# Altium PCB Exp 10_Rev-1.PcbDoc
Units mm, origin at the board's own origin, x right, y up, seen from the top; angles counter-clockwise.
Board outline 152.4 x 136.53 mm, 2 copper layers (Top Layer, Bottom Layer); 66 components, 92 nets, 217 pads, 0 vias.
Unrouted connection lines stored in the file: 7.
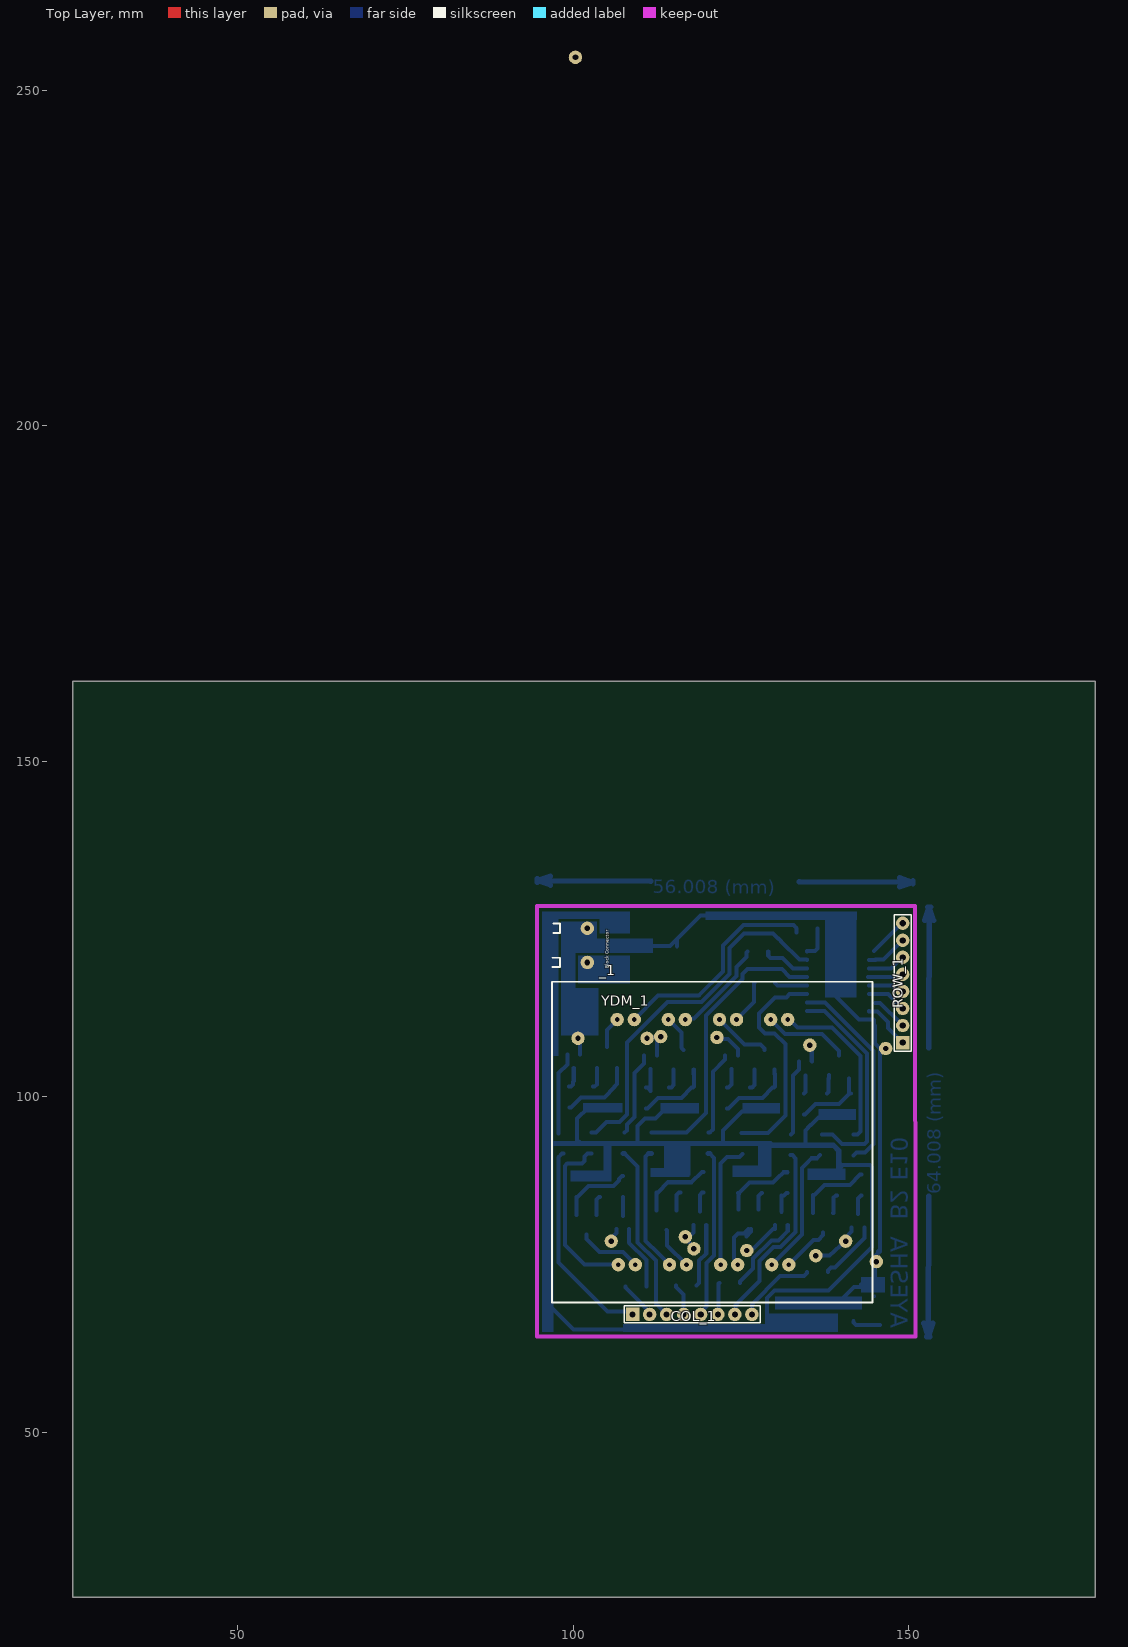
[diagram p0: Top Layer view]
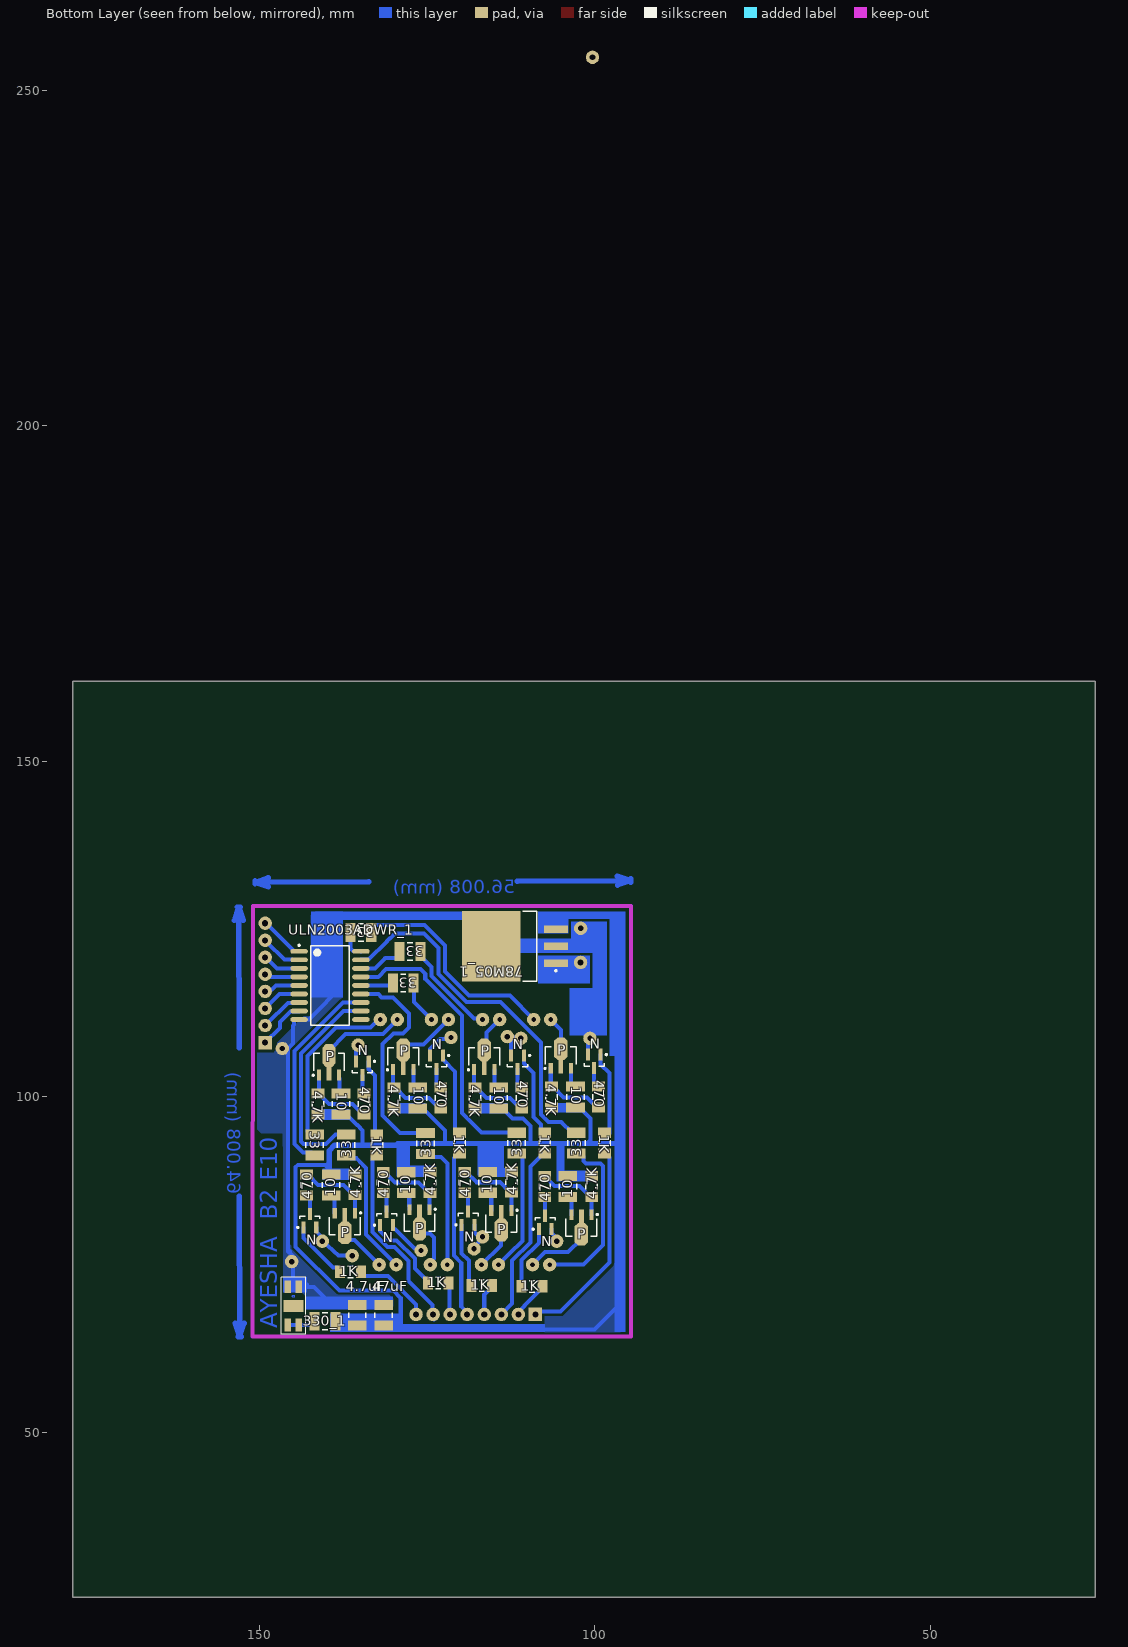
[diagram p1: Bottom Layer view, seen from below]

## Layer stack, top to bottom
Top Solder: solder mask 0.0102, Solder Resist, Dk 3.5
Top Layer: signal copper 0.0356
Dielectric 1: dielectric 0.32, FR-4, Dk 4.8
Bottom Layer: signal copper 0.0356
Bottom Solder: solder mask 0.0102, Solder Resist, Dk 3.5

## Board outline
25.4,25.4 177.8,25.4 177.8,161.925 25.4,161.925

## Design rules (kind name [scope] priority, off if disabled: settings)
Clearance [All] p1: gap=0.35 ignorepadtopadclearanceinfootprint=FALSE
PlaneClearance [All] p1: clearance=0.85
PolygonConnect [All] p1: connectstyle=Direct reliefconductorwidth=0.254 reliefentries=4 polygonreliefangle="90 Angle" airgapwidth=0.254
RoutingVias [All] p1: holewidth=0.711 width=1.27 viastyle="Through Hole" minholewidth=0.711 minwidth=1.27 maxholewidth=0.711 maxwidth=1.27
SolderMaskExpansion [All] p1: expansion=0.102 istentingtop=FALSE
Width [All] p1: maxlimit=1 minlimit=0.6 preferedwidth=0.6 minimp=50.000000 maximp=50.000000 favimp=50.000000
29 further rules are at their usual default settings.

## Components (designator, comment, footprint, x,y, rotation, side; value= is the part's Value field where it differs from the comment)
1K "Comment" RESC3216M 132.461,92.837 r270 bottom
1K "Comment" RESC3216M 98.552,93.091 r270 bottom
1K "Comment" RESC3216M 120.142,93.091 r270 bottom
1K "Comment" RESC3216M 107.442,93.091 r270 bottom
1K "Comment" RESC3216M 123.317,72.263 r180 bottom
1K "Comment" RESC3216M 116.84,71.882 r180 bottom
1K "Comment" RESC3216M 136.398,73.914 r180 bottom
1K "Comment" RESC3216M 109.347,71.755 r180 bottom
4.7K "Comment" RESC3216M 141.224,98.933 r270 bottom
4.7K "Comment" RESC3216M 106.426,99.949 r270 bottom
4.7K "Comment" RESC3216M 129.921,99.822 r270 bottom
4.7K "Comment" RESC3216M 117.856,99.822 r270 bottom
4.7K "Comment" RESC3216M 124.538,87.226 r90 bottom
4.7K "Comment" RESC3216M 112.395,87.275 r90 bottom
4.7K "Comment" RESC3216M 135.714,86.883 r90 bottom
4.7K "Comment" RESC3216M 100.457,86.64 r90 bottom
4.7uF "Comment" CAPC3225M 135.382,67.437 r90 bottom
10 "Comment" RESC3225M 137.795,98.933 r270 bottom
10 "Comment" RESC3225M 102.87,99.949 r270 bottom
10 "Comment" RESC3225M 126.365,99.822 r270 bottom
10 "Comment" RESC3225M 114.3,99.822 r270 bottom
10 "Comment" RESC3225M 128.094,87.2 r90 bottom
10 "Comment" RESC3225M 115.951,87.249 r90 bottom
10 "Comment" RESC3225M 139.27,86.857 r90 bottom
10 "Comment" RESC3225M 104.013,86.614 r90 bottom
33 "Comment" RESC3225M 134.848,124.46 r0 bottom
33 "Comment" RESC3225M 102.743,93.091 r90 bottom
33 "Comment" RESC3225M 111.633,93.091 r90 bottom
33 "Comment" RESC3225M 127.508,121.666 r0 bottom
33 "Comment" RESC3225M 125.217,93.041 r90 bottom
33 "Comment" RESC3225M 128.524,116.967 r0 bottom
33 "Comment" RESC3225M 137.033,92.837 r90 bottom
33 "Comment" RESC3225M 141.732,92.811 r270 bottom
47uF "Comment" CAPC3225M 131.445,67.437 r90 bottom
78M05_1 "Comment" TO254P1420-4M 111.891,122.428 r0 bottom
330_1 "Comment" RESC3225M 140.208,66.548 r180 bottom
470 "Comment" RESC3216M 134.366,98.933 r270 bottom
470 "Comment" RESC3216M 99.441,99.949 r270 bottom
470 "Comment" RESC3216M 122.936,99.822 r270 bottom
470 "Comment" RESC3216M 110.871,99.822 r270 bottom
470 "Comment" RESC3216M 131.523,87.2 r90 bottom
470 "Comment" RESC3216M 119.38,87.249 r90 bottom
470 "Comment" RESC3216M 142.953,86.857 r90 bottom
470 "Comment" RESC3216M 107.442,86.614 r90 bottom
_1 "Comment" "PCB Block Connector" 101.854,122.555 r90 top
COL_1 "Comment" HDR1X8 108.839,67.564 r0 top
N "Comment" SOT23-3M 134.62,104.267 r270 bottom
N "Comment" SOT23-3M 100.076,105.283 r270 bottom
N "Comment" SOT23-3M 123.571,105.156 r270 bottom
N "Comment" SOT23-3M 111.506,105.156 r270 bottom
N "Comment" SOT23-3M 131.015,81.866 r90 bottom
N "Comment" SOT23-3M 118.872,81.915 r90 bottom
N "Comment" SOT23-3M 142.445,81.523 r90 bottom
N "Comment" SOT23-3M 107.381,81.264 r90 bottom
P "Comment" SOT89M 139.597,105.151 r90 bottom
P "Comment" SOT89M 105.053,106.167 r90 bottom
P "Comment" SOT89M 128.524,105.967 r90 bottom
P "Comment" SOT89M 116.459,105.967 r90 bottom
P "Comment" SOT89M 126.111,81.28 r270 bottom
P "Comment" SOT89M 113.919,81.137 r270 bottom
P "Comment" SOT89M 137.238,80.745 r270 bottom
P "Comment" SOT89M 101.981,80.502 r270 bottom
ROW_1 "Comment" HDR1X8 149.098,108.077 r90 top
ULN2003ADWR_1 "Comment" SOIC127P1030-18M 139.446,116.586 r180 bottom
YDM_1 "Comment" "Yellow or Green Dot Matrix DIsplay" 120.607,93.244 r0 top locked net-tie
? "Comment" SMD-LED 144.907,68.834 r90 bottom

## Footprints (in the part's own frame and the unit in brackets; to place one, negate y for a bottom-side part, rotate by r counter-clockwise, add the part's x,y. Pads: shape width x height; smd on the part's side, far side on the other; paste and mask are expansions set on the pad)
CAPC3225M [mm] "Chip Capacitor, Body 3.2x2.5mm, IPC Low Density"
  rect 1.5x2.8 smd: 1(-1.55,0) 2(1.55,0)
  silkscreen extent -0.4,-1.3 0.4,1.3, body extent -1.7,-1.35 1.7,1.35, height 1.35
HDR1X8 [mm] "Connector; Header; 8 Position"
  rect 2x2 hole 0.9: 1(0,0)
  round 2 hole 0.9: 2(2.54,0) 3(5.08,0) 4(7.62,0) 5(10.16,0) 6(12.7,0) 7(15.24,0) 8(17.78,0)
  silkscreen extent -1.27,-1.27 19.05,1.27
"PCB Block Connector" [mm]
  round 2 hole 0.85: 1(-2.54,-0.254) 2(2.54,-0.24)
  silkscreen extent -3.22,3.82 3.25,4.96, body extent -5,-5.45 5.03,4.96, height 5.08
RESC3216M [mm] "Chip Resistor, Body 3.2x1.6mm, IPC Low Density"
  rect 1.5x1.9 smd: 1(-1.55,0) 2(1.55,0)
  silkscreen extent -0.4,-0.85 0.4,0.85, body extent -1.68,-0.87 1.68,0.87, height 0.71
RESC3225M [mm] "Chip Resistor, Body 3.2x2.5mm, IPC Low Density"
  rect 1.5x2.8 smd: 1(-1.55,0) 2(1.55,0)
  silkscreen extent -0.4,-1.3 0.4,1.3, body extent -1.68,-1.32 1.68,1.32, height 0.71
SMD-LED [mm] "SMD LED PCB"
  rect 1.9x1 smd: 1(-2.85,0.82) 2(-2.85,-0.82) 3(2.85,-0.82) 4(2.85,0.82)
  rect 1.8x3 smd: 5(0,0)
  Top Layer circle w0.154: c1.441,-0.01 r0.149
  silkscreen extent -4.25,-1.84 4.25,1.82
SOIC127P1030-18M [mm] "SOIC, 18-Leads, Body 11.6x7.5mm, Pitch 1.27mm, IPC Low Density"
  oval 2.6x0.7 smd: 1(-4.6,5.08) 2(-4.6,3.81) 3(-4.6,2.54) 4(-4.6,1.27) 5(-4.6,0) 6(-4.6,-1.27) 7(-4.6,-2.54) 8(-4.6,-3.81) 9(-4.6,-5.08) 10(4.6,-5.08) 11(4.6,-3.81) 12(4.6,-2.54) 13(4.6,-1.27) 14(4.6,0) 15(4.6,1.27) 16(4.6,2.54) 17(4.6,3.81) 18(4.6,5.08)
  silkscreen extent -4.72,-5.9 2.9,6.1, body extent -3.8,-5.95 3.8,5.95, height 2.65
SOT23-3M [mm] "SOT23, 3-Leads, Body 2.9x1.3mm, Pitch 0.95mm, Lead Span 2.5mm, IPC Low Density"
  rect 1.8x0.6 smd: b(-1,0.95) c(1,0) e(-1,-0.95)
  silkscreen extent -1.12,-1.5 0.7,1.92, body extent -0.7,-1.5 0.7,1.5, height 1.1
SOT89M [mm] "SOT89, 3-Leads, Body 4.5x2.4 mm, Pitch 1.5mm, Lead Span 4.1mm, IPC Low Density"
  rect 1.6x0.6 smd: b(-1.9,1.5) e(-1.9,-1.5)
  rect 2x0.7 smd: c(-1.7,0)
  oct 3.4x2 smd: c(1,0)
  silkscreen extent -2.07,-2.3 1.3,2.48, body extent -1.3,-2.3 1.3,2.3, height 1.6
TO254P1420-4M [mm] "D2-PAK, 4-Leads, Body 8.9x10.1mm, Pitch 2.54mm, Lead Span 14.2mm, IPC Low Density"
  rect 8.7x10.55 smd: C(3.55,0)
  rect 3.6x1.1 smd: GND(-6.1,0) input(-6.1,2.54) OUT(-6.1,-2.54)
  silkscreen extent -6.22,-5.2 -1.2,5.2, body extent -3.25,-5.2 6.15,5.2, height 4.65
"Yellow or Green Dot Matrix DIsplay" [mm] "Y or G Dot Matrix"
  round 2 hole 0.7: 3(-13.886,-18.262) 4(-11.346,-18.262) 6(-6.266,-18.262) 7(-3.726,-18.262) 9(1.354,-18.262) 10(3.894,-18.262) 12(8.974,-18.262) 13(11.514,-18.262) 20(11.346,18.262) 21(8.806,18.262) 23(3.726,18.262) 24(1.186,18.262) 26(-3.894,18.262) 27(-6.434,18.262) 29(-11.514,18.262) 30(-14.054,18.262)
  silkscreen extent -23.78,-23.9 23.99,23.89

## Free pads (board coordinates)
  round 2 hole 0.85: 2(100.33,254.889)
  round 2 hole 0.8: 3(136.144,76.327) 4(135.255,107.696) 5(121.412,108.839) 6(113.03,108.966) 7(100.711,108.712) 8(105.664,78.486) 9(116.713,79.121) 11(110.998,108.712) 12(146.558,107.188) 13(117.983,77.343) 15(145.161,75.438) 16(140.589,78.486)
  round 2 hole 0.762: 14(125.857,77.089)

## Nets (pads, with @x,y where several pads share a name; then routed paths per layer and width w, separated by ;. In a path a pad name is that pad's centre, name@x,y a point inside that pad or via, vN(x,y) a via of type N, cw(c..) or ccw(c..) an arc to the next point about the centre after c; other vN are vias at no path point)
1: 33.1@102.743,91.541 YDM_1.3 | length 26.1
  Bottom Layer w0.6: 33.1@102.743,91.541 102.093,91.541 101.643,91.091 101.643,90.394 101.292,90.043 99.106,90.043 98.755,89.692 98.755,77.902 101.675,74.982 YDM_1.3
2: P.c@101.981,79.502 P.c@101.981,82.202 YDM_1.4 | length 9.6
  Bottom Layer w0.6: P.c@101.981,79.502 101.981,78.802 103.947,76.836 107.406,76.836 YDM_1.4
3: 33.1@111.633,91.541 YDM_1.6 | length 18.6
  Bottom Layer w0.6: 33.1@111.237,91.541 110.795,91.099 110.795,78.527 112.71,76.612 YDM_1.6
  Bottom Layer w0.8: 33.1@111.237,91.541 33.1@111.633,91.541
4: P.c@113.919,80.137 P.c@113.919,82.837 YDM_1.7 | length 6.4
  Bottom Layer w0.6: P.c@113.919,80.137 113.98,80.076 113.98,77.87 116.868,74.982 YDM_1.7
5: 33.1@125.217,91.491 YDM_1.9 | length 18.7
  Bottom Layer w0.6: YDM_1.9@121.96,75.236 121.96,90.083 122.918,91.041 124.767,91.041 33.1@125.217,91.491
6: P.c@126.111,80.28 P.c@126.111,82.98 YDM_1.10 | length 8.3
  Bottom Layer w0.6: YDM_1.10 124.5,75.361 123.952,75.909 123.952,78.994 124.562,79.604 125.435,79.604 P.c@126.111,80.28 ; P.c@125.792,79.204 126.492,79.904 P.c@126.492,80.28
7: 33.1@137.033,91.287 YDM_1.12 | length 19.8
  Bottom Layer w0.6: YDM_1.12 129.612,74.982 134.073,79.443 134.073,89.411 134.65,89.988 135.499,90.837 136.329,90.837 33.1@136.779,91.287
8: P.c@137.238,79.745 P.c@137.238,82.445 YDM_1.13 | length 7.3
  Bottom Layer w0.6: YDM_1.13 134.016,76.878 135.807,78.669 136.538,78.669 137.238,79.369 P.c@137.238,79.745
9: 33.1@141.732,94.361 YDM_1.20 | length 25.6
  Bottom Layer w0.6: YDM_1.20 132.22,111.506 133.43,110.296 138.571,110.296 142.824,106.043 142.824,94.811 142.374,94.361 33.1@141.732,94.361
10: P.c@139.597,103.451 P.c@139.597,106.151 YDM_1.21 | length 12.8
  Bottom Layer w0.6: YDM_1.21 131.573,109.346 137.102,109.346 139.597,106.851 P.c@139.597,106.151
11: 33.1@126.974,116.967 YDM_1.23 | length 6.6
  Bottom Layer w0.6: YDM_1.23 126.94,114.113 126.94,116.933 33.1@126.974,116.967
12: P.c@128.524,104.267 P.c@128.524,106.967 YDM_1.24 | length 8.7
  Bottom Layer w0.6: YDM_1.24 125.532,107.767 127.924,107.767 128.524,107.167 P.c@128.524,106.967
13: 33.1@125.958,121.666 YDM_1.26 | length 14.6
  Bottom Layer w0.6: YDM_1.26 116.896,111.689 118.017,111.689 120.754,114.427 124.301,117.974 124.301,119.359 125.787,120.845 125.787,121.495 33.1@125.958,121.666
14: P.c@116.459,104.267 P.c@116.459,106.967 YDM_1.27 | length 5.5
  Bottom Layer w0.6: YDM_1.27 116.125,109.554 116.125,107.301 P.c@116.459,106.967
15: 33.1@133.298,124.46 YDM_1.29 | length 33.2
  Bottom Layer w0.6: YDM_1.29 112.649,115.062 118.702,115.062 122.301,118.661 122.301,122.555 125.349,125.603 132.155,125.603 132.198,125.56 132.848,125.56 133.298,125.11 33.1@133.298,124.46
16: P.c@105.053,104.467 P.c@105.053,107.167 YDM_1.30 | length 4.7
  Bottom Layer w0.6: P.c@105.029,107.445 105.029,109.982 YDM_1.30
_1: 33.2@102.743,94.641 ULN2003ADWR_1.17 | length 54.6
  Bottom Layer w0.6: 33.2@102.743,94.641 103.393,94.641 104.987,96.235 106.882,96.235 108.026,97.38 108.026,108.073 114.065,114.112 119.096,114.112 123.251,118.267 123.251,122.161 125.422,124.333 129.794,124.333 130.538,123.589 130.585,123.589 130.966,123.208 130.966,123.161 133.681,120.446 134.796,120.446 ULN2003ADWR_1.17
_3: 33.2@111.633,94.641 ULN2003ADWR_1.15 | length 42.7
  Bottom Layer w0.6: 33.2@111.633,94.641 116.844,94.641 119.762,97.559 119.762,112.091 125.251,117.58 125.251,118.313 125.955,119.017 131.093,119.017 132.254,117.856 ULN2003ADWR_1.15
_5: 33.2@125.217,94.591 ULN2003ADWR_1.13 | length 33.7
  Bottom Layer w0.6: 33.2@125.093,94.591 129.001,94.591 131.621,97.211 131.621,106.95 131.6,106.971 131.6,107.834 130.017,109.417 128.581,109.417 127.663,110.335 127.663,112.423 130.057,114.817 131.752,114.817 132.251,115.316 ULN2003ADWR_1.13
_7: 33.2@137.033,94.387 ULN2003ADWR_1.11 | length 32.1
  Bottom Layer w0.6: ULN2003ADWR_1.11 134.871,112.751 137.46,112.751 137.764,112.447 143.782,106.429 143.782,93.342 143.401,92.961 140.055,92.961 138.629,94.387 33.2@137.033,94.387
_9: 33.2@141.732,91.261 ULN2003ADWR_1.12 | length 30.5
  Bottom Layer w0.6: ULN2003ADWR_1.12 137.508,114.046 144.732,106.822 144.732,92.948 143.495,91.711 142.182,91.711 33.2@141.732,91.261
_11: 33.2@130.074,116.967 ULN2003ADWR_1.14 | length 4.9
  Bottom Layer w0.6: 33.2@130.074,116.967 130.074,116.936 130.424,116.586 ULN2003ADWR_1.14
_13: 33.2@129.058,121.666 ULN2003ADWR_1.16 | length 7.2
  Bottom Layer w0.6: 33.2@129.058,121.666 129.058,121.016 129.408,120.666 131.212,120.666 132.752,119.126 ULN2003ADWR_1.16
_15: 33.2@136.398,124.46 ULN2003ADWR_1.18 | length 4.8
  Bottom Layer w0.6: ULN2003ADWR_1.18 134.865,121.685 136.016,121.685 136.398,122.067 33.2@136.398,125.105
D1: ROW_1.7 ULN2003ADWR_1.2 | length 5.8
  Bottom Layer w0.6: ULN2003ADWR_1.2 145.023,120.396 145.073,120.446 146.227,120.446 ROW_1.7@148.802,123.021
D2: 1K.2@107.797,71.755 COL_1.2 | length 5.7
  Bottom Layer w0.6: 1K.2@107.797,71.755 107.797,71.555 110.489,68.863 110.489,68.833 111.379,67.943 COL_1.2
D3: ROW_1.5 ULN2003ADWR_1.4 | length 5.3
  Bottom Layer w0.6: ULN2003ADWR_1.4@143.919,117.856 148.338,117.856 148.719,118.237 ROW_1.5
D4: 1K.2@115.29,71.882 COL_1.4 | length 4.8
  Bottom Layer w0.6: 1K.2@115.29,71.882 115.29,71.682 116.459,70.513 COL_1.4
D5: ROW_1.3 ULN2003ADWR_1.6 | length 5.9
  Bottom Layer w0.6: ULN2003ADWR_1.6 146.939,115.316 ROW_1.3
D6: 1K.2@121.767,72.263 COL_1.6 | length 4.8
  Bottom Layer w0.6: COL_1.6 121.653,67.678 121.653,72.149 1K.2@121.767,72.263
D7: ROW_1.1 ULN2003ADWR_1.8 | length 7.5
  Bottom Layer w0.6: ULN2003ADWR_1.8 144.096,112.726 145.332,112.726 146.915,111.143 146.915,110.26 ROW_1.1
D8: 1K.2@134.848,73.914 COL_1.8 | length 11.9
  Bottom Layer w0.6: COL_1.8 126.619,69.065 130.818,73.264 134.398,73.264 134.848,73.714 1K.2@134.848,73.914
D9: ROW_1.2 ULN2003ADWR_1.7 | length 5.3
  Bottom Layer w0.6: ULN2003ADWR_1.7@144.946,113.996 145.732,113.996 148.844,110.884 ROW_1.2@148.844,110.744
D10: 1K.2@132.461,91.287 COL_1.7 | length 29.3
  Bottom Layer w0.6: COL_1.7@123.952,66.817 123.952,67.818 124.206,68.072 124.206,68.983 127.762,72.539 127.762,75.497 129.847,77.582 130.869,77.582 133.123,79.836 133.123,90.825 132.661,91.287 1K.2@132.407,91.287
D11: ROW_1.4 ULN2003ADWR_1.5 | length 5.2
  Bottom Layer w0.6: ULN2003ADWR_1.5 147.497,116.586 148.118,115.965 148.828,115.965 ROW_1.4@148.916,116.054
D12: 1K.2@120.142,91.541 COL_1.5 | length 25.3
  Bottom Layer w0.6: COL_1.5 118.999,67.859 119.888,68.748 119.888,75.243 120.98,76.335 120.98,90.903 1K.2@120.342,91.541
  Bottom Layer w0.8: 1K.2@120.142,91.541 1K.2@120.342,91.541
D13: ROW_1.6 ULN2003ADWR_1.3 | length 5.6
  Bottom Layer w0.6: ULN2003ADWR_1.3 147.32,119.126 ROW_1.6@148.969,120.775
D14: 1K.2@107.442,91.541 COL_1.3 | length 26.8
  Bottom Layer w0.6: 1K.2@107.642,91.541 109.601,89.582 109.601,78.318 112.297,75.622 112.297,69.186 COL_1.3
  Bottom Layer w0.8: 1K.2@107.442,91.541 1K.2@107.642,91.541
D15: ROW_1.8 ULN2003ADWR_1.1 | length 6
  Bottom Layer w0.6: ULN2003ADWR_1.1@144.819,121.716 148.96,125.857 ROW_1.8
D16: 1K.2@98.552,91.541 COL_1.1 | length 30.9
  Bottom Layer w0.6: 1K.2@98.552,91.541 98.352,91.541 97.797,90.986 97.797,75.304 105.085,68.016 108.387,68.016 COL_1.1
GND: 4.7uF.2 47uF.2 78M05_1.C 78M05_1.GND ?.3 ?.4 _1.2 N.e pad.3 pad.4 pad.5 pad.6 pad.7 pad.8 pad.9 pad.11 pad.12 pad.13 pad.14 pad.15 pad.16 ULN2003ADWR_1.9 | length 168.6
  Bottom Layer w0.6: N.e@101.026,106.283 101.026,109.413 100.711,109.728 99.792,109.728 99.441,110.079 99.441,122.442 _1.2 102.094,124.093 78M05_1.GND@104.086,122.101 ; 78M05_1.GND@105.006,122.358 105.231,122.133 78M05_1.GND@106.116,122.133 ; pad.8 105.932,78.754 105.932,79.165 106.431,79.664 N.e@106.431,80.264 ; 78M05_1.GND@107.569,122.492 114.452,122.492 78M05_1.C@115.31,123.35 ; pad.11 111.125,108.839 pad.6@112.903,108.839 ; N.e@112.456,106.156 112.456,108.392 pad.6@112.903,108.839 ; pad.6 pad.6@112.903,108.839 ; 78M05_1.C 115.441,123.219 78M05_1.C@115.31,123.35 ; N.e@117.922,80.915 117.922,79.769 117.108,78.954 116.88,78.954 116.776,79.057 116.776,78.803 117.983,77.597 pad.13 ; pad.5 121.642,108.609 123.063,108.609 124.521,107.152 N.e@124.521,106.156 ; pad.14@125.603,77.089 125.617,77.357 126.887,77.357 129.796,80.266 130.065,80.266 N.e@130.065,80.866 ; pad.4 135.539,107.539 135.539,105.298 N.e@135.57,105.267 ; pad.3 138.176,76.327 pad.16 140.462,78.89 141.495,79.923 N.e@141.495,80.523 ; 136.348,69.953 4.7uF.2 4.7uF.2@136.032,68.987 ; 136.588,69.913 136.382,69.707 136.382,69.337 4.7uF.2@136.032,68.987 ; 139.891,121.221 137.922,119.253 ; 142.875,71.684 141.858,71.684 139.161,68.987 4.7uF.2@136.032,68.987 ; 142.875,72.009 144.126,72.009 144.969,72.852 pad.15@144.969,75.438 ; ?.3@143.944,71.827 ?.3 ; ULN2003ADWR_1.9 144.759,111.506 144.805,111.46 144.805,110.747 144.969,110.583 144.969,107.929 145.682,107.216 145.682,77.227 145.428,76.973 ; ULN2003ADWR_1.9@144.046,111.525 142.602,111.525 141.986,112.141 137.922,116.205 137.922,119.253 ; pad.15 145.086,75.963 145.034,76.325 145.682,76.973 ; 78M05_1.C@115.31,123.35 118.96,127 137.92,127 137.922,126.998 137.922,119.253
Input: 78M05_1.input _1.1 | length 3.6
  Bottom Layer w0.6: _1.1@103.028,120.272 103.352,120.272 103.964,119.66 106.176,119.66 78M05_1.input@106.326,119.51
LED_R: 330_1.1 ?.1 ?.2 | length 4.3
  Bottom Layer w0.6: 330_1.1 141.758,66.334 142.108,65.984 ?.2 ?.1
N2b: 1K.1@110.897,71.755 N.b@108.331,80.264 | length 9.6
  Bottom Layer w0.6: N.b@108.331,80.264 108.331,78.244 110.91,75.665 110.91,71.768 1K.1@110.897,71.755
N2c: 470.1@107.442,85.064 N.c@107.381,82.264 | length 2.8
  Bottom Layer w0.6: N.c@107.381,82.264 107.442,82.325 470.1@107.442,85.064
N2e: 
N4b: 1K.1@118.39,71.882 N.b@119.822,80.915 | length 9.6
  Bottom Layer w0.6: 1K.1@118.39,71.882 118.745,72.237 118.745,75.571 119.822,76.648 N.b@119.822,80.915
N4c: 470.1@119.38,85.699 N.c@118.872,82.915 | length 3.1
  Bottom Layer w0.6: N.c@118.872,82.915 118.872,85.349 119.222,85.699 470.1@119.38,85.699
N4e: 
N6b: 1K.1@124.867,72.263 N.b@131.965,80.866 | length 12.1
  Bottom Layer w0.6: 1K.1@124.867,72.263 124.867,72.463 126.812,74.408 126.812,75.891 129.534,78.613 130.556,78.613 131.965,80.022 N.b@131.965,80.866
N6c: 470.1@131.523,85.65 N.c@131.015,82.866 | length 3.1
  Bottom Layer w0.6: N.c@131.015,82.866 470.1@131.015,85.3 ; 470.1@131.396,85.3 131.746,85.65 470.1@131.904,85.65
N6e: 
N8b: 1K.1@137.948,73.914 N.b@143.395,80.523 | length 9.2
  Bottom Layer w0.6: 1K.1@137.948,73.914 137.948,74.114 138.398,74.564 139,74.564 143.395,78.959 N.b@143.395,80.523
N8c: 470.1@142.953,85.307 N.c@142.445,82.523 | length 3
  Bottom Layer w0.6: N.c@142.445,82.523 142.445,84.857 142.895,85.307 470.1@142.953,85.307
N8e: 
N10b: 1K.1@132.461,94.387 N.b@133.67,105.267 | length 11.4
  Bottom Layer w0.6: 1K.1@132.461,94.387 132.766,94.692 132.766,103.175 133.67,104.079 N.b@133.67,105.267
N10c: 470.1@134.366,100.483 N.c@134.62,103.267 | length 2.8
  Bottom Layer w0.6: 470.1@134.366,100.483 134.62,100.737 N.c@134.62,103.146
N10e: 
N12b: 1K.1@120.142,94.641 N.b@122.621,106.156 | length 12.7
  Bottom Layer w0.6: 1K.1@120.142,94.641 120.342,94.641 120.792,95.091 120.792,103.727 122.621,105.556 N.b@122.621,106.156
N12c: 470.1@122.936,101.372 N.c@123.571,104.156 | length 3.2
  Bottom Layer w0.6: 470.1@122.936,101.372 123.136,101.372 123.571,101.807 N.c@123.571,104.156
N12e: 
N14b: 1K.1@107.442,94.641 N.b@110.556,106.156 | length 12.7
  Bottom Layer w0.6: 1K.1@107.642,94.641 107.992,94.991 107.992,95.861 109.097,96.966 109.097,103.509 110.556,104.968 N.b@110.556,106.156
N14c: 470.1@110.871,101.372 N.c@111.506,104.156 | length 4.1
  Bottom Layer w0.6: 470.1@110.871,101.372 111.071,101.372 470.1@111.506,100.937 ; 470.1@111.506,100.838 470.1@111.506,100.937 ; N.c@111.506,104.156 470.1@111.506,100.937
N14e: 
N16b: 1K.1@98.552,94.641 N.b@99.126,106.283 | length 12.3
  Bottom Layer w0.6: 1K.1@97.805,94.532 97.805,103.52 99.126,104.841 N.b@99.126,106.283
N16c: 470.1@99.441,101.499 N.c@100.076,104.283 | length 3.2
  Bottom Layer w0.6: 470.1@99.387,101.499 99.641,101.499 99.991,101.849 99.991,102.233 100.076,102.318 N.c@100.076,104.283
N16e: 
P2b: 4.7K.1@100.457,85.09 470.2@107.442,88.164 P.b@100.481,82.402 | length 11.1
  Bottom Layer w0.6: P.b@100.481,82.402 100.469,82.414 100.469,85.078 100.457,85.09 100.657,85.09 102.293,86.726 106.004,86.726 106.792,87.514 106.792,87.714 107.242,88.164 470.2@107.442,88.164
P2c: 
P2e: 10.1@104.013,85.064 P.e@103.481,82.402 | length 3
  Bottom Layer w0.6: P.e@103.481,82.402 103.481,84.714 103.831,85.064 10.1@104.013,85.064
P4b: 4.7K.1@112.395,85.725 470.2@119.38,88.799 P.b@112.419,83.037 | length 10.8
  Bottom Layer w0.6: 4.7K.1@112.395,85.725 112.419,85.701 P.b@112.419,83.037 ; 4.7K.1@112.595,85.725 114.132,87.262 117.643,87.262 119.18,88.799 470.2@119.38,88.799
P4c: 
P4e: 10.1@115.951,85.699 P.e@115.419,83.037 | length 3
  Bottom Layer w0.6: P.e@115.419,83.037 115.419,85.349 115.769,85.699 10.1@115.951,85.699
P6b: 4.7K.1@124.538,85.676 470.2@131.523,88.75 P.b@124.611,83.18 | length 11.1
  Bottom Layer w0.6: P.b@124.611,83.18 124.611,85.603 124.538,85.676 4.7K.1@124.714,85.5 ; 4.7K.1@124.726,85.664 124.916,85.854 126.275,87.213 129.788,87.213 130.444,87.869 130.444,87.871 131.323,88.75 470.2@131.523,88.75 ; 470.2@131.704,88.75 470.2@131.904,88.75
P6c: 
P6e: 10.1@128.094,85.65 P.e@127.611,83.18 | length 2.7
  Bottom Layer w0.6: P.e@127.611,83.18 127.611,83.68 127.635,83.704 127.635,85.2 128.085,85.65 10.1@128.094,85.65
P8b: 4.7K.1@135.714,85.333 470.2@142.953,88.407 P.b@135.738,82.645 | length 11.2
  Bottom Layer w0.6: P.b@135.738,82.645 135.738,85.32 135.714,85.333 135.914,85.333 137.451,86.87 141.216,86.87 142.753,88.407 470.2@142.953,88.407
P8c: 
P8e: 10.1@139.27,85.307 P.e@138.738,82.645 | length 3
  Bottom Layer w0.6: P.e@138.738,82.645 138.75,82.657 138.75,84.956 139.168,85.306 10.1@139.27,85.306
P10b: 4.7K.1@141.224,100.483 470.2@134.366,97.383 P.b@141.097,103.251 | length 10.6
  Bottom Layer w0.6: 470.2@134.366,97.383 134.566,97.383 136.116,98.933 139.601,98.933 141.151,100.483 141.351,100.483 141.097,100.737 P.b@141.097,102.751
P10c: 
P10e: 10.1@137.795,100.483 P.e@138.097,103.251 | length 2.9
  Bottom Layer w0.6: 10.1@137.795,100.483 138.049,100.737 138.049,102.703 138.097,102.751 P.e@138.097,103.251
P12b: 4.7K.1@129.921,101.372 470.2@122.936,98.272 P.b@130.024,104.067 | length 11
  Bottom Layer w0.6: 470.2@122.936,98.272 123.136,98.272 124.686,99.822 128.171,99.822 129.721,101.372 129.921,101.372 130.048,101.499 130.048,103.367 130.024,103.391 P.b@130.024,104.067
P12c: 
P12e: 10.1@126.365,101.372 P.e@127.024,104.067 | length 3.1
  Bottom Layer w0.6: 10.1@126.365,101.372 126.674,101.372 127.024,101.722 P.e@127.024,104.067
P14b: 4.7K.1@117.856,101.372 470.2@110.871,98.272 P.b@117.959,104.067 | length 11
  Bottom Layer w0.6: 470.2@110.871,98.272 111.071,98.272 112.621,99.822 116.106,99.822 117.656,101.372 117.856,101.372 117.983,101.499 117.983,103.367 117.959,103.391 P.b@117.959,104.067
P14c: 
P14e: 10.1@114.3,101.372 P.e@114.959,104.067 | length 3.1
  Bottom Layer w0.6: 10.1@114.3,101.372 114.609,101.372 114.959,101.722 P.e@114.959,104.067
P16b: 4.7K.1@106.426,101.499 470.2@99.441,98.399 P.b@106.553,104.267 | length 11
  Bottom Layer w0.6: 470.2@99.441,98.399 99.641,98.399 101.141,99.899 104.626,99.899 106.172,101.445 106.172,101.499 106.553,101.88 P.b@106.553,104.267
P16c: 
P16e: 10.1@102.87,101.499 P.e@103.553,104.267 | length 3.2
  Bottom Layer w0.6: 10.1@102.949,101.499 103.203,101.499 103.553,101.849 P.e@103.553,104.267
VCC: 4.7K.2 4.7uF.1 10.2 47uF.1 78M05_1.OUT 330_1.2 | length 247.5
  Bottom Layer w0.6: 96.203,96.276 96.467,96.012 96.647,96.012 ; 96.554,93.218 96.554,68.8 100.042,65.312 123.444,65.312 123.444,65.542 128.58,65.542 128.905,65.867 128.905,70.007 130.018,71.12 138.049,71.12 144.553,77.624 144.553,89.51 144.202,89.861 140.121,89.861 139.967,89.707 ; 96.647,93.218 96.647,96.012 ; 96.705,127.254 105.05,127.254 105.275,127.03 ; 97.028,116.84 96.454,116.257 96.566,116.257 96.647,116.176 96.647,96.012 ; 100.926,93.248 100.593,93.58 100.593,96.783 102.171,98.361 102.87,98.361 104.394,98.361 ; 10.2@102.87,98.399 104.394,98.399 ; 10.2@104.013,88.164 104.254,88.164 104.267,88.177 102.489,88.177 102.489,88.201 102.902,88.614 10.2@105.113,88.614 ; 105.093,90.297 105.093,88.886 105.364,88.614 10.2@105.367,88.614 ; 106.194,127.287 106.194,125.472 106.444,125.222 78M05_1.OUT@107.293,125.222 ; 109.583,93.041 109.583,95.66 110.671,96.748 112.242,96.748 113.65,98.156 113.65,98.272 113.676,98.298 115.887,98.298 ; 122.301,93.041 122.301,94.996 125.141,97.836 125.522,97.836 125.603,97.917 125.603,98.298 128.016,98.298 ; 4.7K.2@124.919,88.776 124.932,88.763 125.069,88.9 126.555,88.9 ; 128.524,90.742 128.524,89.431 10.2@128.855,89.1 ; 10.2@129.109,89.1 129.109,91.326 129.109,92.622 ; 134.617,92.941 134.617,94.996 134.983,95.363 134.983,95.406 135.364,95.787 135.407,95.787 10.2@136.553,96.933 ; 4.7uF.1 135.737,65.532 138.208,65.532 138.658,65.982 330_1.2 ; 10.2@136.557,96.933 137.345,96.933 137.795,97.383 137.832,97.346 139.319,97.346 ; 137.731,88.419 135.739,88.419 135.726,88.433 135.748,88.456 137.731,88.456 ; 10.2@138.627,88.419 10.2@138.64,88.407
  Bottom Layer w0.8: 96.647,93.041 96.647,93.218 ; 96.666,93.041 100.926,93.041 109.424,93.041 ; 109.583,93.041 116.205,93.041 ; 115.506,90.805 116.205,91.504 116.205,93.041 ; 129.109,91.326 128.524,90.742 128.524,92.191 129.14,92.807 129.25,92.807 ; 137.731,88.456 138.627,88.456 139.157,88.456 139.582,88.881 139.582,89.707 ; 139.967,89.707 139.582,90.092 139.582,91.949 138.744,92.787 134.617,92.787 129.59,92.787 129.336,93.041 122.301,93.041 116.205,93.041
pads on no net: ?.5 ULN2003ADWR_1.10
copper on no net: | length 94.7
  Bottom Layer w0.8: 94.614,131.953 94.616,132.461 ; 96.612,131.531 94.615,132.207 ; 96.618,132.865 94.615,132.207 ; 111.568,132.13 94.615,132.207 ; 133.669,132.03 150.622,131.953 ; 148.619,131.295 150.622,131.953 ; 148.625,132.629 150.622,131.953 ; 150.621,131.699 150.623,132.207 ; 152.245,66.263 152.908,64.262 ; 152.364,126.271 153.035,128.27 ; 152.654,64.263 153.162,64.261 ; 152.781,128.271 153.289,128.269 ; 152.95,85.215 152.908,64.262 ; 152.993,107.317 153.035,128.27 ; 153.579,66.261 152.908,64.262 ; 153.698,126.269 153.035,128.27

## Polygon pours and split planes (outlines as drawn)
GND on Bottom Layer "NONET_L-01_P-001" (solid, pour order 1): 137.922,114.554 138.176,114.173 137.541,114.808 145.415,106.934 145.415,78.04 138.471,70.739 130.048,70.739 130.048,68.268 143.002,68.389 143.002,70.231 143.637,70.866 146.431,70.866 146.431,92.583 150.495,94.869 150.495,106.553 147.828,106.553 147.474,107.088 147.33,108.067 143.383,112.014 142.294,112.062 142.294,127.708 142.113,127.889 141.859,127.635 137.541,127.635 137.541,115.316 137.541,114.808 137.668,114.681 137.795,114.554
VCC on Bottom Layer "NONET_L-01_P-001" (solid, pour order 0): 95.885,64.516 107.442,64.516 107.442,67.818 104.902,67.818 96.52,76.2 95.885,76.2

## Keep-outs
Keep-Out Layer:
  lines w0.6: 94.615,64.262 151.026,64.262 150.893,128.397 94.615,128.397 94.615,64.262

## Other copper
Bottom Layer:
  rectangle net VCC: 134.874,87.63 140.589,89.281
  rectangle net VCC: 136.525,96.52 142.113,98.171
  rectangle net VCC: 125.222,97.536 130.81,99.06
  rectangle net VCC: 113.03,97.536 118.745,99.06
  rectangle net VCC: 101.473,97.663 107.315,99.06
  rectangle net VCC: 128.778,65.405 139.446,67.691
  rectangle net VCC: 95.377,64.918 97.028,127.635
  rectangle net VCC: 123.698,88.011 129.413,89.789
  rectangle net VCC: 127.508,88.138 129.54,93.345
  rectangle net VCC: 111.506,88.011 117.348,89.408
  rectangle net VCC: 113.538,88.265 117.475,93.345
  rectangle net VCC: 99.568,87.376 105.41,89.027
  rectangle net VCC: 104.521,87.376 105.664,93.218
  rectangle net VCC: 96.16,64.918 97.028,127.127
  rectangle net GND: 137.541,114.808 142.24,127.635
  rectangle net GND: 119.711,126.365 142.294,127.635
  rectangle net GND: 142.875,70.866 146.431,73.152
  rectangle net GND: 130.048,68.326 143.002,70.231
  rectangle net VCC: 107.442,64.918 139.446,66.167
  rectangle net GND: 98.171,109.093 103.759,116.205
  rectangle net VCC: 96.266,106.045 97.79,127.635
  rectangle net GND: 98.171,109.22 100.33,126.111
  rectangle net GND: 98.806,121.412 103.505,126.111
  rectangle net VCC: 96.266,65.151 97.028,126.873
  rectangle net VCC: 95.377,126.492 108.458,127.635
  rectangle net VCC: 103.886,124.333 108.458,127.635
  rectangle net Input: 100.711,116.84 108.458,121.031
  rectangle net GND: 103.251,121.412 111.887,123.571
  text "56.008 (mm)" at 111.814,130.329 h2 r359.74
  text "E10" at 147.312,87.495 h2.5 r270
  text "64.008 (mm)" at 154.75,85.466 h2 r89.89
  text "B2" at 147.312,81.653 h2.5 r270
  text "AYESHA" at 147.312,65.524 h2.5 r270

## Text inside footprints (layer, text, board x,y; h text height)
_1: Top Overlay "Block Connector" at 105.283,119.126 h0.51 r90